# Altium PCB Carrierboard_PCB.PcbDoc
Units mm, origin at the board's own origin, x right, y up, seen from the top; angles counter-clockwise.
Board outline 50 x 50 mm, 2 copper layers (Top Layer, Bottom Layer); 29 components, 26 nets, 162 pads, 46 vias.
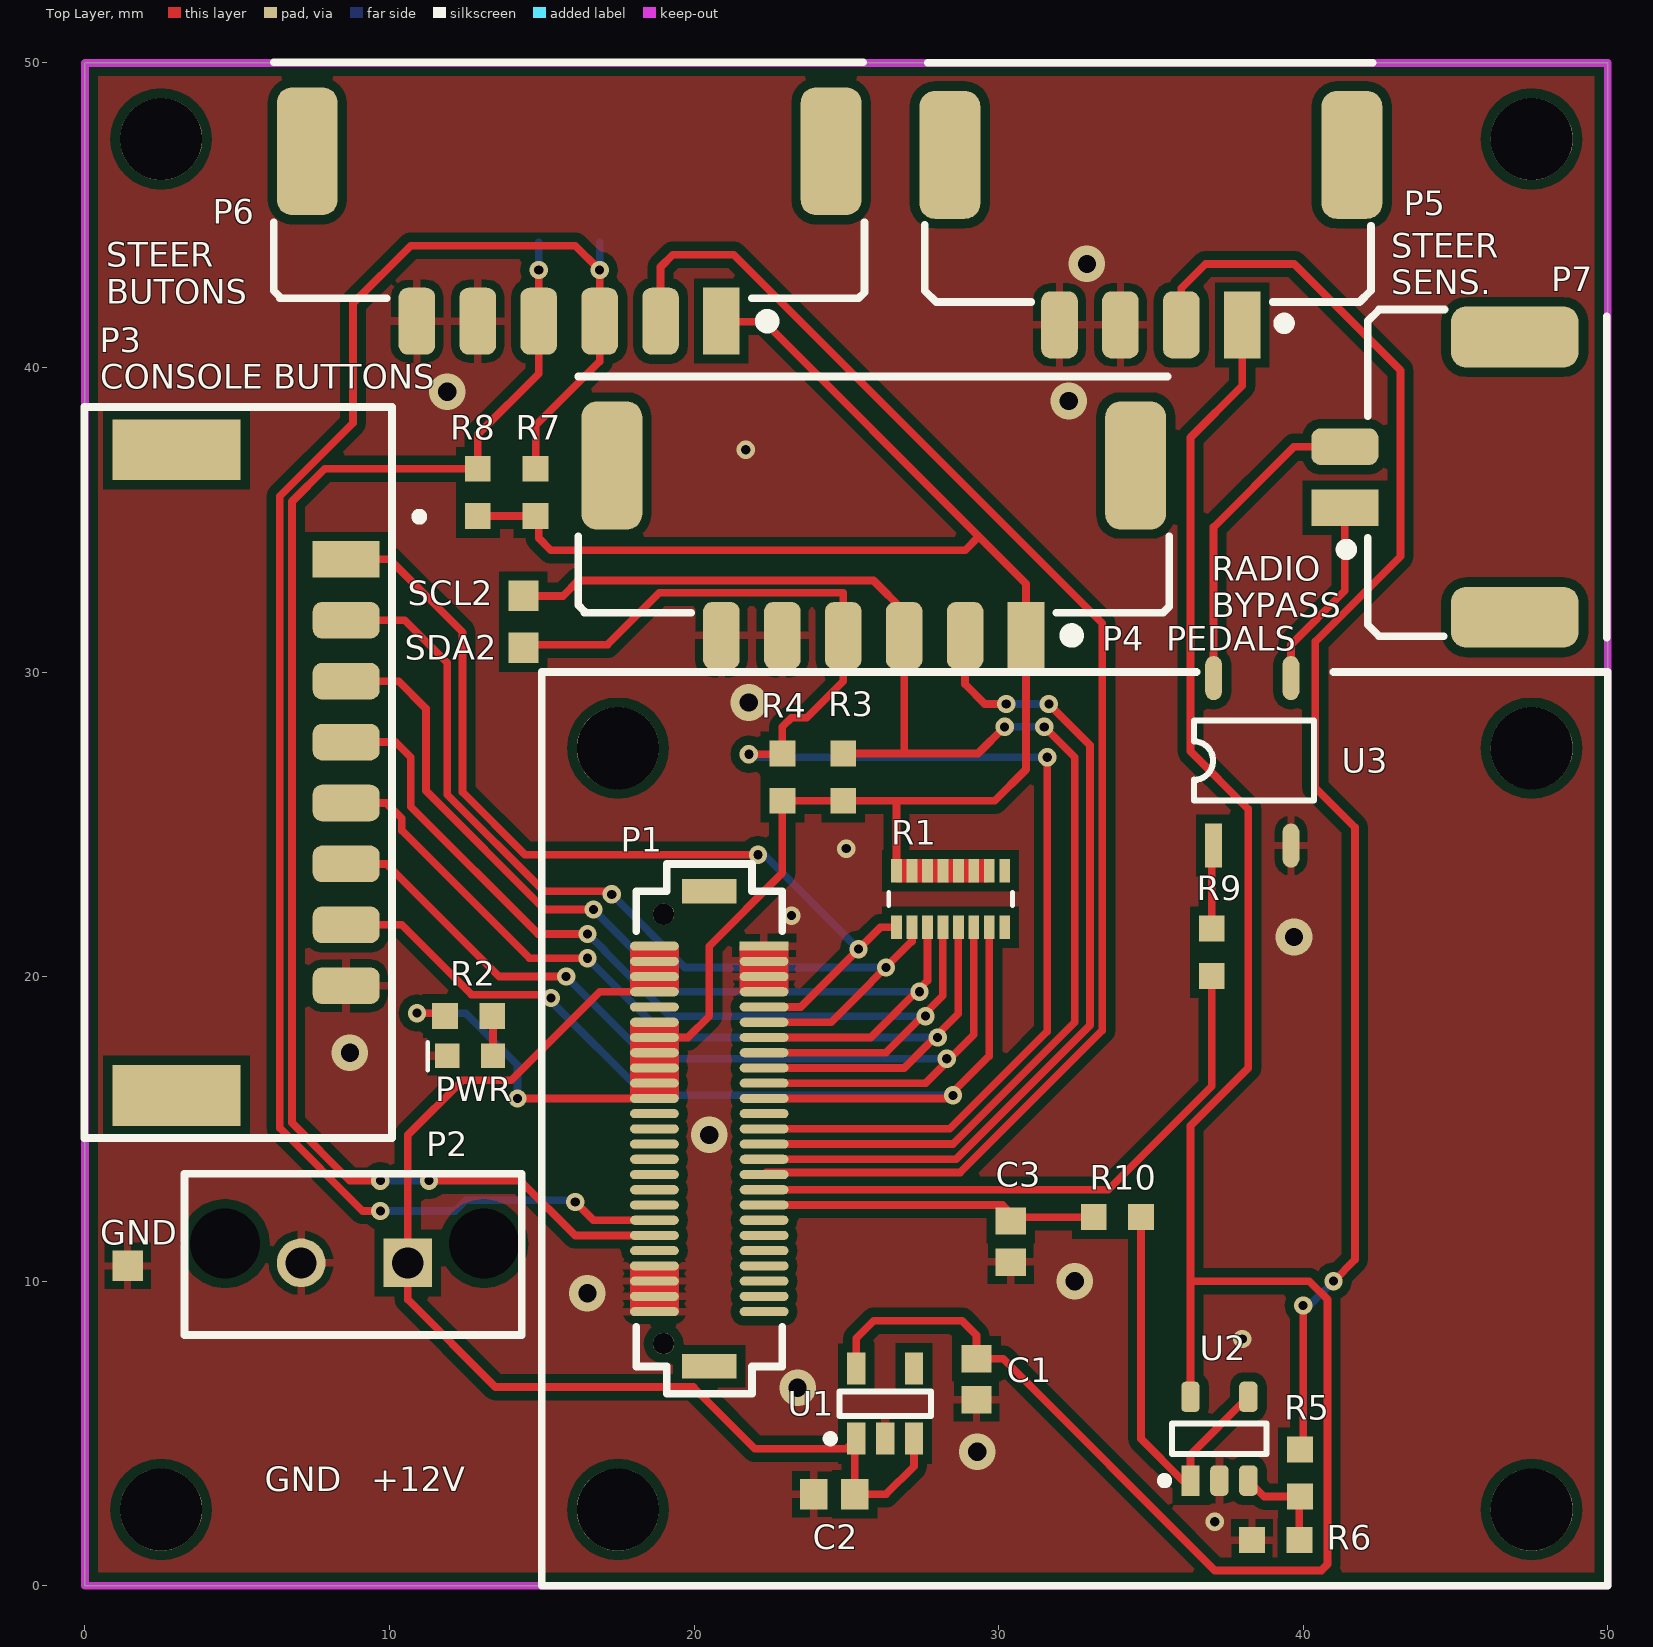
[diagram p0: Top Layer view]
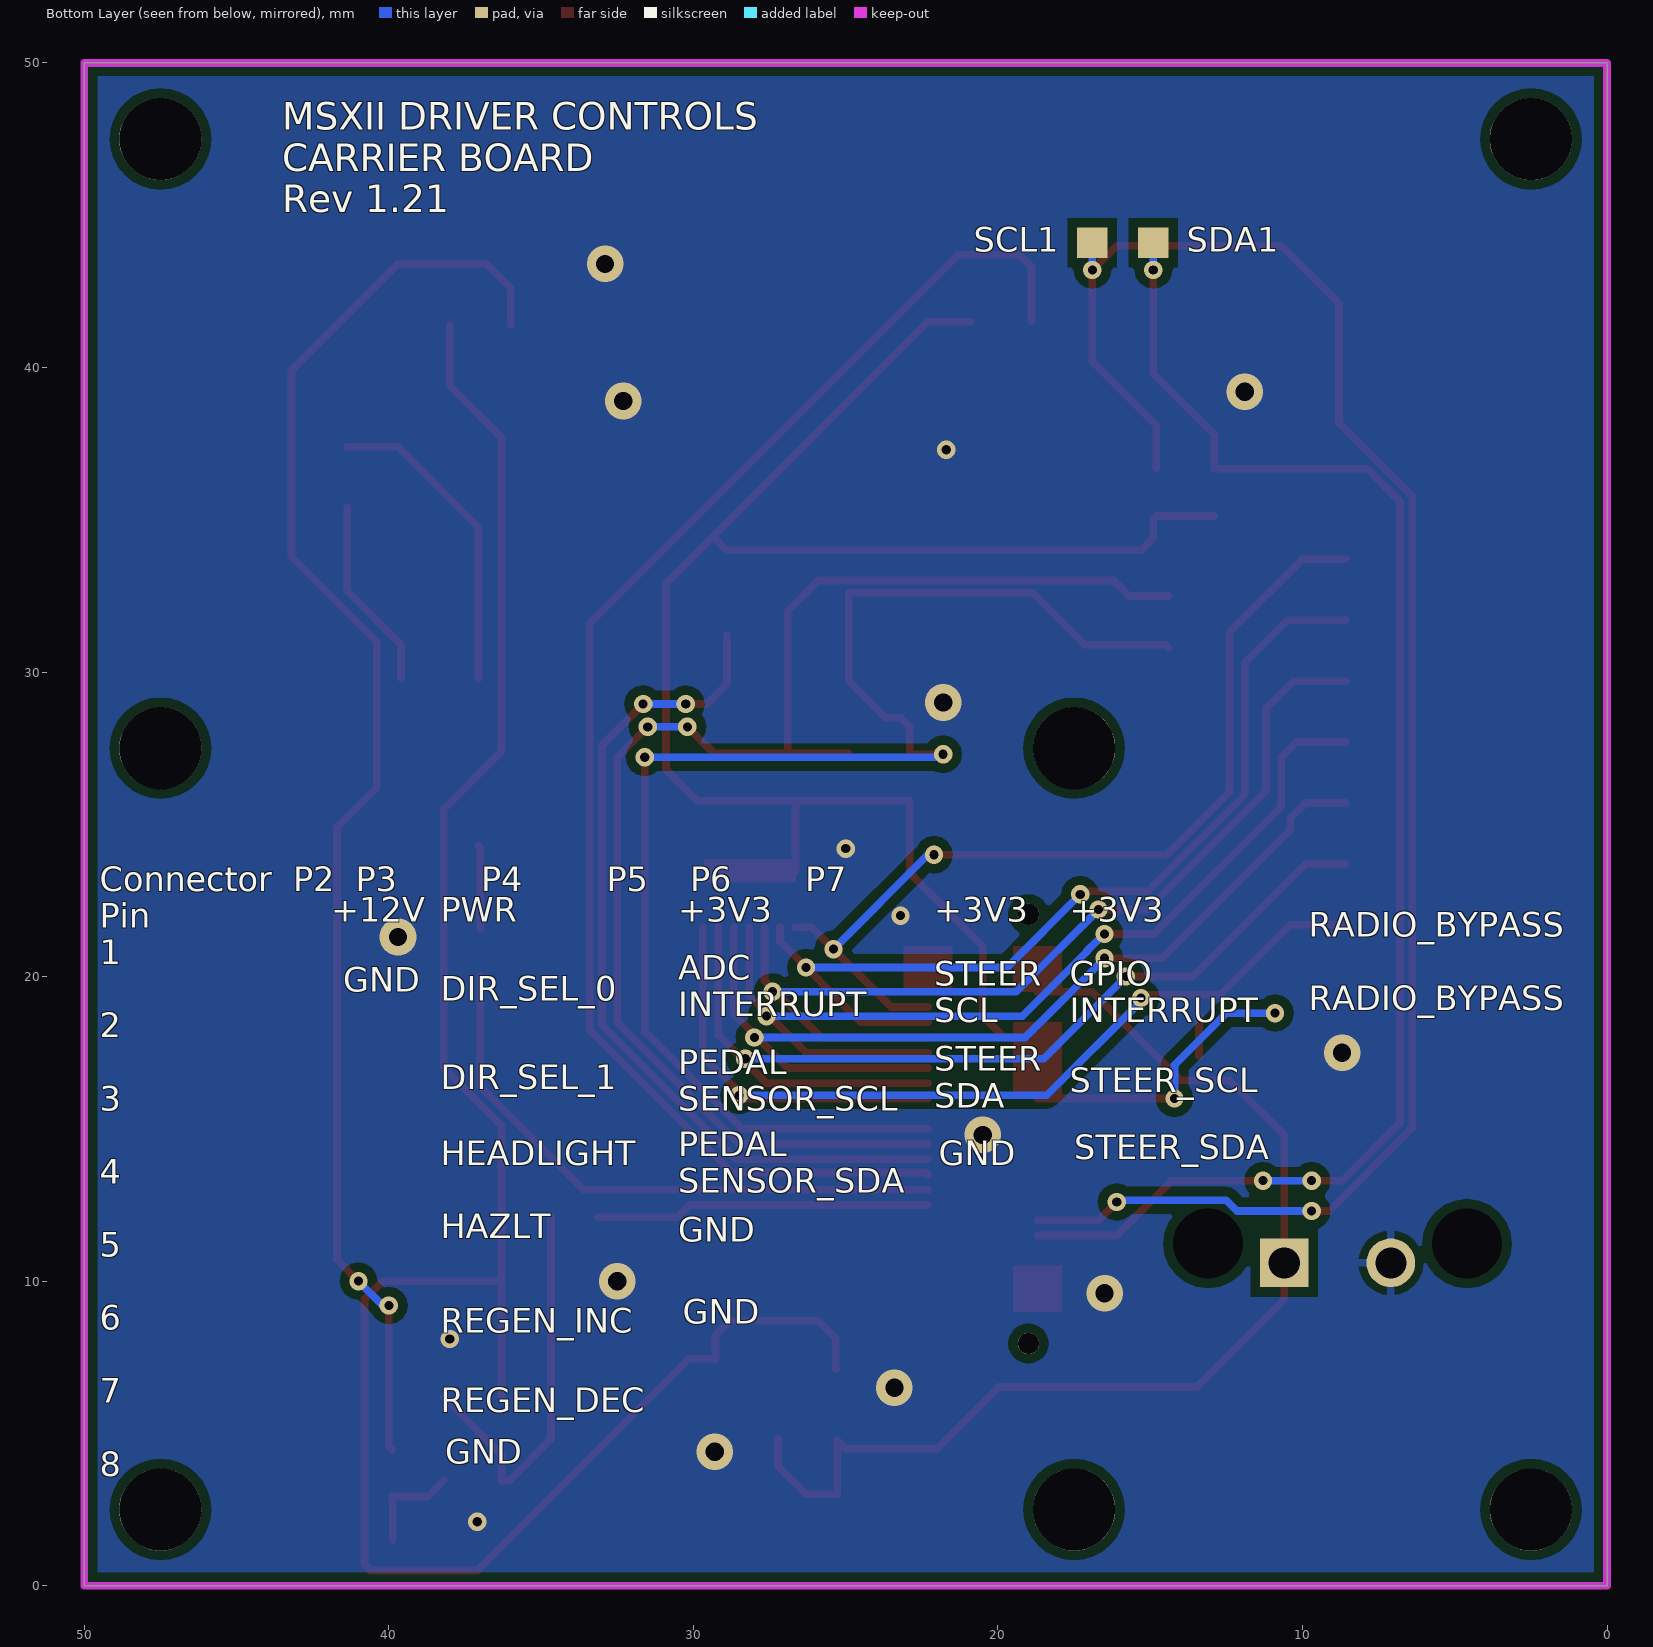
[diagram p1: Bottom Layer view, seen from below]
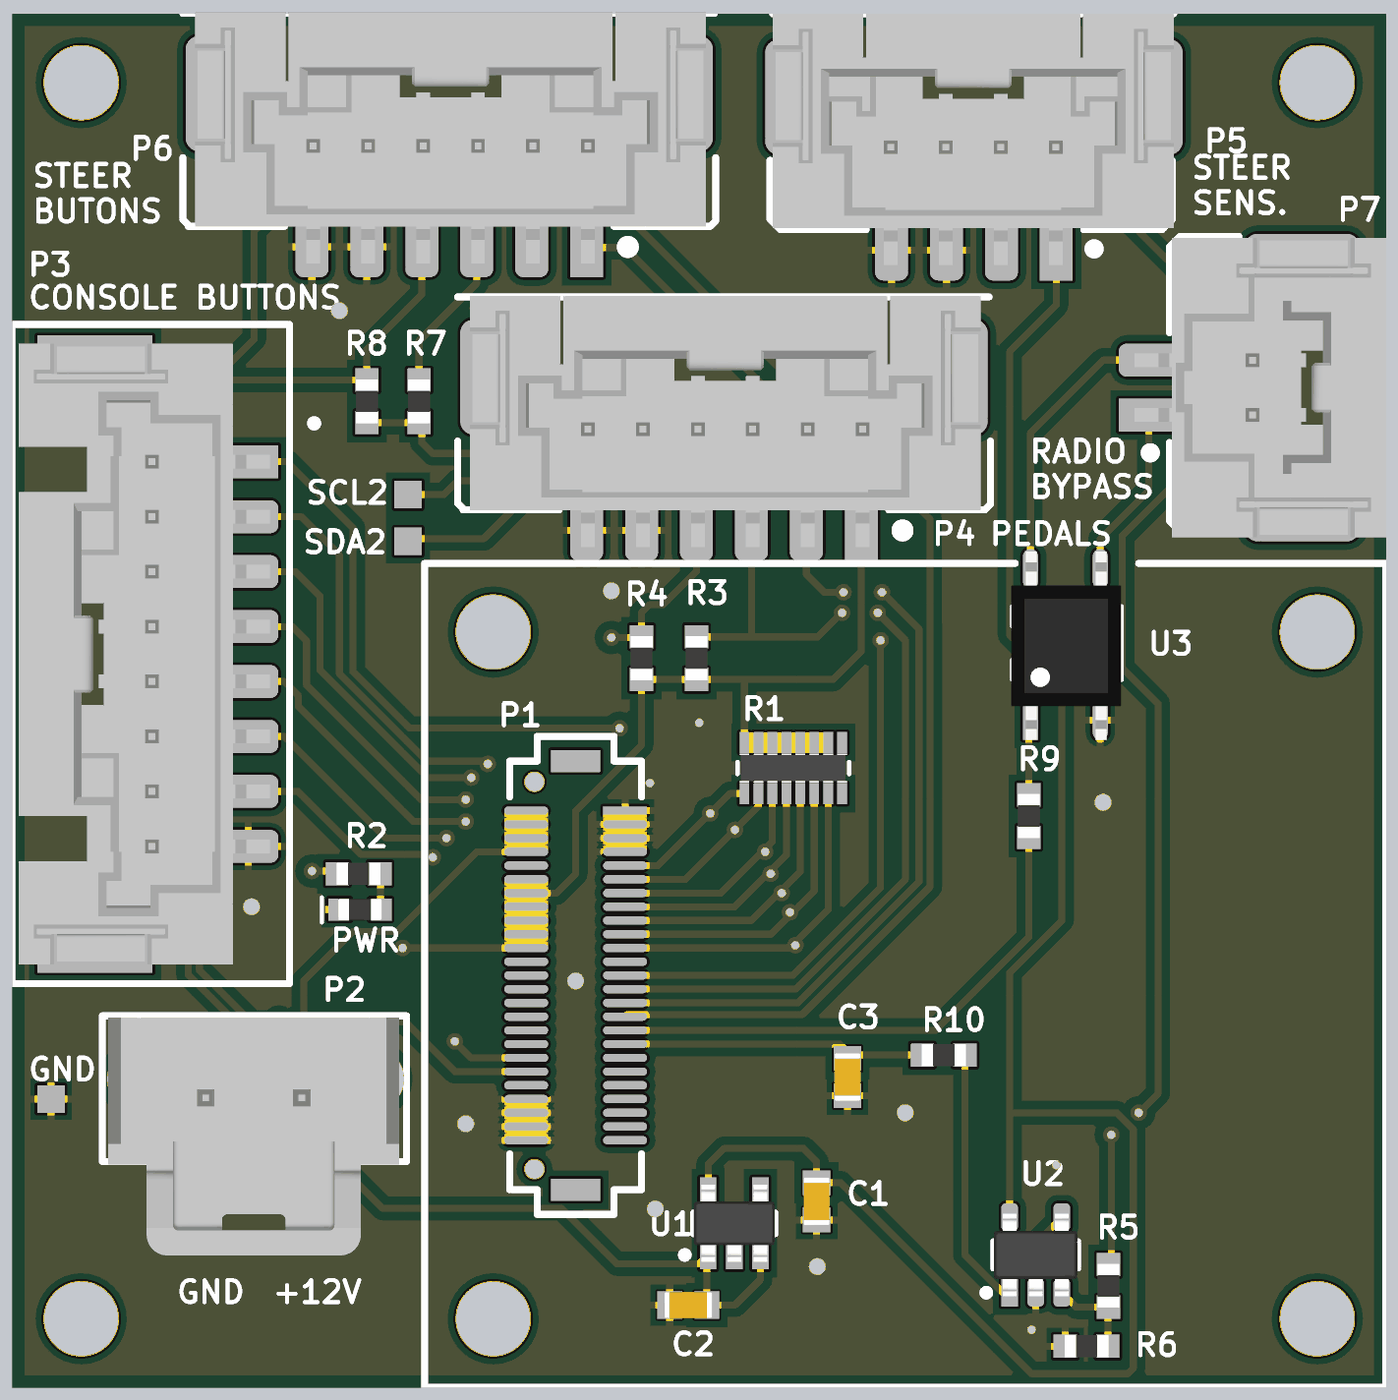
[diagram p2: 3D render of the assembled board from above, using the file's embedded part models]

## Layer stack, top to bottom
Top Solder: solder mask 0.0102, Solder Resist, Dk 3.5
Top Layer: signal copper 0.0356
Dielectric 1: dielectric 0.32, FR-4, Dk 4.8
Bottom Layer: signal copper 0.0356
Bottom Solder: solder mask 0.0102, Solder Resist, Dk 3.5

## Board outline
0,50 0,0 50,0 50,50

## Design rules (kind name [scope] priority, off if disabled: settings)
Clearance "Stitching GND" [IsStitchingVia and InNet('GND') vs (IsVia and (Not IsStitchingVia)) Or IsPad] p1: gap=0.127 ignorepadtopadclearanceinfootprint=FALSE
Clearance [All] p2: gap=0.152 ignorepadtopadclearanceinfootprint=FALSE except(0.305: Arc-Fill Arc-Poly Arc-Region Track-Fill Track-Poly Track-Region SMDPad-Fill SMDPad-Poly SMDPad-Region THPad-Fill THPad-Poly THPad-Region Via-Fill Via-Poly Via-Region)
PolygonConnect [All] p1: thpad.connectstyle=Relief thpad.reliefconductorwidth=0.254 thpad.reliefentries=4 thpad.polygonreliefangle="90 Angle" thpad.airgapwidth=0.254 smdpad.connectstyle=Relief smdpad.reliefconductorwidth=0.254 smdpad.reliefentries=4 smdpad.polygonreliefangle="90 Angle" smdpad.airgapwidth=0.254 via.connectstyle=Direct via.reliefconductorwidth=0.254 via.reliefentries=4 via.polygonreliefangle="90 Angle" via.airgapwidth=0.254
RoutingVias [All] p1: holewidth=0.711 width=1.27 viastyle="Through Hole" minholewidth=0.711 minwidth=1.27 maxholewidth=0.711 maxwidth=1.27
SolderMaskExpansion [All] p1: expansion=0.102
Width [All] p1: maxlimit=0.635 minlimit=0.254 preferedwidth=0.254
30 further rules are at their usual default settings.

## Classes and differential pairs
component class driverControlsMezzanine: P1

## Components (designator, comment, footprint, x,y, rotation, side; value= is the part's Value field where it differs from the comment)
C1 "CAP CER 2.2UF 25V 10% X5R 0603" "CAP, 0603" 29.275,6.775 r270 top
C2 "CAP CER 1UF 50V 10% X7R 0603" "CAP, 0603" 24.6,3 r180 top
C3 "CAP CER 10nF 50V 5% X7R 0603" "CAP, 0603" 30.4,11.3 r270 top
GND "Test Point" "Test Point"#1 1.4,10.5 r90 top (schematic designator TP5)
P1 "CONN 50POS Bergstak Plug 0.02\"" "CONN, Bergstak 50 Pos Plug" 20.5,15 r0 top
P2 "CONN 2POS ULTRA-FIT 0.138\"" "CONN, 2POS ULTRA-FIT" 10.6,10.6 r180 top
P3 "CONN 8POS DURA-CLIK 0.079\"" "CONN, 8POS Dura-Clik" 8.58,33.7 r270 top
P4 "DURA-CLIK" "CONN, 6POS DURA-CLIK VERT" 30.9,31.2 r180 top
P5 "DURA-CLIK" "CONN, 4POS DURA-CLIK VERT" 38,41.4 r180 top
P6 "DURA-CLIK" "CONN, 6POS DURA-CLIK VERT" 20.9,41.52 r180 top
P7 "Dura-Clik" "CONN, 2POS Dura-Click Vertical" 41.37,35.4 r90 top
PWR "LED GREEN CLEAR 2V 0603" LED_0603 13.35,17.41 r180 top (schematic designator LED1)
R1 "RES ARRAY 10K OHM 5% 8RES" "RES ARRAY, 8 POS 1506" 28.425,22.55 r90 top value=Value
R2 "RES 510 OHM 5% 1/10W 0603" "RES, 0603" 12.6,18.7 r0 top
R3 "1K" "RES, 0603" 24.9,26.55 r90 top
R4 "1K" "RES, 0603" 22.9,26.55 r90 top
R5 "RES 4.7K OHM 1% 1/10W 0603" "RES, 0603" 39.9,3.7 r270 top
R6 "RES 6.8k OHM 1% 1/10W 0603" "RES, 0603" 39.1,1.5 r180 top
R7 "1K" "RES, 0603" 14.8,35.9 r90 top
R8 "1K" "RES, 0603" 12.9,35.9 r90 top
R9 "2K" "RES, 0603" 37,20.8 r270 top
R10 "RES 0.0 OHM 1/4W 0603" "RES, 0603" 33.9,12.1 r180 top
SCL1 "Test Point" "Test Point"#2 16.9,44.1 r90 top (schematic designator TP3)
SCL2 "Test Point" "Test Point"#1 14.4,32.5 r90 top (schematic designator TP1)
SDA1 "Test Point" "Test Point"#2 14.9,44.1 r90 top (schematic designator TP4)
SDA2 "Test Point" "Test Point"#1 14.4,30.8 r90 top (schematic designator TP2)
U1 "IC REG LDO 5V 0.1A SOT23-5" SOT95P280X145-5N 26.275,5.975 r90 top
U2 "IC OP AMP GEN PURPOSE RR 10MHZ SOT-23-5" "IC OP AMP GP RR 10MHZ SOT-23-5" 37.25,4.825 r90 top
U3 "CPC1017N" "RELAY SOP4" 37.06,24.3 r90 top

## Footprints (in the part's own frame and the unit in brackets; to place one, negate y for a bottom-side part, rotate by r counter-clockwise, add the part's x,y. Pads: shape width x height; smd on the part's side, far side on the other; paste and mask are expansions set on the pad)
"CAP, 0603" [mm] "Chip Capacitor, 2-Leads, Body 1.60x0.81mm, IPC Medium Density"
  rect 0.9x1 smd mask+0.076: 1(-0.675,0) 2(0.675,0)
  body extent -0.87,-0.48 0.87,0.48, height 0.9
"CONN, 2POS Dura-Click Vertical" [mm] "WM7169CT-ND"
  rect 1.2x2.2 smd: 1(0,0)
  rrect50% 1.2x2.2 smd: 2(2,0)
  rrect50% 2x4.2 smd: 3(-3.6,-5.58) 3(5.6,-5.58)
  silkscreen extent -4.28,-8.6 6.5,0.05, body extent -4.45,-8.63 6.45,0.52, height 8
"CONN, 2POS ULTRA-FIT" [mm] "2 Positions Header, Shrouded Connector 0.138\" (3.50mm) Through Hole Gold"
  rect 1.6x1.6 hole 1.02: 1(0,0)
  round 1.6 hole 1.02: 2(3.5,0)
  round 1.6 hole 2.3: ""(-2.5,-0.63) ""(6,-0.63)
  silkscreen extent -3.74,-2.93 7.33,2.37, body extent -3.48,-2.87 7.12,5.79, height 13.85
"CONN, 4POS DURA-CLIK VERT" [mm]
  rect 1.2x2.2 smd: 1(0,0)
  rrect50% 1.2x2.2 smd: 2(2,0) 3(4,0) 4(6,0)
  rrect50% 2x4.2 smd: 7(-3.6,-5.58) 7(9.6,-5.58)
  silkscreen extent -4.28,-8.61 10.42,0.05, body extent -4.28,-8.61 10.32,0.54, height 8
"CONN, 6POS DURA-CLIK VERT" [mm]
  rect 1.2x2.2 smd: 1(0,0)
  rrect50% 1.2x2.2 smd: 2(2,0) 3(4,0) 4(6,0) 5(8,0) 6(10,0)
  rrect50% 2x4.2 smd: 7(-3.6,-5.58) 7(13.6,-5.58)
  silkscreen extent -4.7,-8.5 14.7,0.15, body extent -4.35,-8.54 14.25,0.61, height 7.97
"CONN, 8POS Dura-Clik" [mm] "WM10868CT-ND"
  rect 1.2x2.2 smd: 1(0,0)
  rrect50% 1.2x2.2 smd: 2(2,0) 3(4,0) 4(6,0) 5(8,0) 6(10,0) 7(12,0) 8(14,0)
  rect 2x4.2 smd: ""(-3.6,-5.58) ""(17.6,-5.58)
  silkscreen extent -5,-8.6 19,2.53, body extent -4.3,-8.36 18.3,0.79, height 8.02
"CONN, Bergstak 50 Pos Plug" [mm] "Bergstak 50 Position Plug"
  rect 1.6x0.3 smd: 1(1.8,6)
  oval 1.6x0.3 smd: 2(1.8,5.5) 3(1.8,5) 4(1.8,4.5) 5(1.8,4) 6(1.8,3.5) 7(1.8,3) 8(1.8,2.5) 9(1.8,2) 10(1.8,1.5) 11(1.8,1) 12(1.8,0.5) 13(1.8,0) 14(1.8,-0.5) 15(1.8,-1) 16(1.8,-1.5) 17(1.8,-2) 18(1.8,-2.5) 19(1.8,-3) 20(1.8,-3.5) 21(1.8,-4) 22(1.8,-4.5) 23(1.8,-5) 24(1.8,-5.5) 25(1.8,-6) 26(-1.8,-6) 27(-1.8,-5.5) 28(-1.8,-5) 29(-1.8,-4.5) 30(-1.8,-4) 31(-1.8,-3.5) 32(-1.8,-3) 33(-1.8,-2.5) 34(-1.8,-2) 35(-1.8,-1.5) 36(-1.8,-1) 37(-1.8,-0.5) 38(-1.8,0) 39(-1.8,0.5) 40(-1.8,1) 41(-1.8,1.5) 42(-1.8,2) 43(-1.8,2.5) 44(-1.8,3) 45(-1.8,3.5) 46(-1.8,4) 47(-1.8,4.5) 48(-1.8,5) 49(-1.8,5.5) 50(-1.8,6)
  round 0.7 hole 0.7: ""(-1.5,-7.05) ""(-1.5,7.05)
  rect 1.8x0.8 smd: ""(0,-7.8) ""(0,7.8)
  silkscreen extent -2.4,-8.7 2.4,8.7
"IC OP AMP GP RR 10MHZ SOT-23-5" [mm] "SOT23, 5-Leads, Body 2.90x2.80mm, Pitch 0.95mm, IPC Medium Density"
  rect 1x0.6 smd: 1(-1.375,0.95)
  rrect50% 1x0.6 smd: 2(-1.375,0) 3(-1.375,-0.95) 4(1.375,-0.95) 5(1.375,0.95)
  silkscreen extent -1.5,-1.55 0.5,1.92, body extent -1.5,-1.53 1.5,1.53, height 1.45
LED_0603 [mm]
  rect 0.8x0.8 smd: 1(-0.05,0.01) 2(1.45,0.01)
  silkscreen extent 2.09,-0.43 2.09,0.48, body extent -0.1,-0.39 1.5,0.41, height 0.55
"RELAY SOP4" [mm]
  rect 1.45x0.55 smd: 1(0,0)
  oval 1.45x0.55 smd: 2(0,-2.54) 3(5.5,-2.54) 4(5.5,0)
  silkscreen extent 1.48,-3.3 4.12,0.65, body extent -0.73,-3.3 6.13,0.7, height 2.02
"RES ARRAY, 8 POS 1506" [mil]
  rect 30x14 smd: 1(-36.5,70) 2(-36.5,50) 3(-36.5,30) 4(-36.5,10) 5(-36.5,-10) 6(-36.5,-30) 7(-36.5,-50) 8(-36.5,-70) 9(36.5,-70) 10(36.5,-50) 11(36.5,-30) 12(36.5,-10) 13(36.5,10) 14(36.5,30) 15(36.5,50) 16(36.5,70)
  silkscreen extent -9,-80 9,80, body extent -21,-77 21,77, height 18
"RES, 0603" [mm] "Chip Resistor, 2-Leads, Body 1.60x0.80mm, IPC Medium Density"
  rect 0.85x0.85 smd: 1(-0.775,0) 2(0.775,0)
  body extent -0.8,-0.4 0.8,0.4, height 0.55
SOT95P280X145-5N [mm] "SOT23, 5-Leads, Body 2.95x2.80mm, Pitch 0.95mm, IPC Medium Density"
  rect 1.05x0.6 smd: 1(-1.15,0.95) 2(-1.15,0) 3(-1.15,-0.95) 4(1.15,-0.95) 5(1.15,0.95)
  silkscreen extent -1.27,-1.5 0.4,1.92, body extent -1.4,-1.48 1.4,1.48, height 1.45
"Test Point"#1 [mm]
  rect 1x1 smd: TP(0,0)
"Test Point"#2 [mm]
  rect 1x1 smd far side: TP(0,0)

## Part data
C1: "2.2µF ±10% 25V Ceramic Capacitor X5R 0603 (1608 Metric)", Capacitance=2.2µF, Manufacturer 1="Murata Electronics North America", Manufacturer Part Number 1=GRM188R61E225KA12D, Operating Temperature="-55°C ~ 85°C", Package / Case="0603 (1608 Metric)", Ratings=-, Supplier Part Number 1=490-10731-1-ND, Temperature Coefficient=X5R, Tolerance=±10%, Voltage=25V, ComponentLink1Description=http://www.murata.com/~/media/webrenewal/support/library/catalog/products/capacitor/mlcc/c02e.ashx, ComponentLink1URL=http://www.murata.com/~/media/webrenewal/support/library/catalog/products/capacitor/mlcc/c02e.ashx, Height - Seated (Max)=-, Lead Spacing=-, Lead Style=-, Mounting Type="Surface Mount, MLCC", Packaging="Cut Tape (CT)", Part Status=Active, Size / Dimension="0.063\" L x 0.031\" W (1.60mm x 0.80mm)", Supplier 1=Digi-Key, Thickness (Max)="0.035\" (0.90mm)"
C2: "1µF ±10% 50V Ceramic Capacitor X7R 0603 (1608 Metric)", Capacitance=1µF, Manufacturer 1="Taiyo Yuden", Manufacturer Part Number 1=UMK107AB7105KA-T, Operating Temperature="-55°C ~ 125°C", Package / Case="0603 (1608 Metric)", Ratings=-, Supplier Part Number 1=587-3247-1-ND, Temperature Coefficient=X7R, Tolerance=±10%, Voltage=50V, ComponentLink1Description=http://www.yuden.co.jp/productdata/catalog/en/mlcc_all_e.pdf, ComponentLink1URL=http://www.yuden.co.jp/productdata/catalog/en/mlcc_all_e.pdf, Height - Seated (Max)=-, Lead Spacing=-, Lead Style=-, Mounting Type="Surface Mount, MLCC", Packaging="Cut Tape (CT)", Part Status=Active, Size / Dimension="0.063\" L x 0.031\" W (1.60mm x 0.80mm)", Supplier 1=Digi-Key, Thickness (Max)="0.037\" (0.95mm)"
C3: "10000pF ±5% 50V Ceramic Capacitor U2J 0603 (1608 Metric)", Capacitance=10000pF, Manufacturer 1=KEMET, Manufacturer Part Number 1=C0603C103J5JAC7867, Operating Temperature="-55°C ~ 125°C", Package / Case="0603 (1608 Metric)", Ratings=-, Supplier Part Number 1=399-13384-1-ND, Temperature Coefficient=U2J, Tolerance=±5%, Voltage=50V, ComponentLink1Description=http://www.kemet.com/docfinder?Partnumber=C0603C103J5JAC7867, ComponentLink1URL=http://www.kemet.com/docfinder?Partnumber=C0603C103J5JAC7867, Failure Rate=-, Height - Seated (Max)=-, Lead Spacing=-, Lead Style=-, Mounting Type="Surface Mount, MLCC", Packaging="Cut Tape (CT)", Part Status=Active, Size / Dimension="0.063\" L x 0.032\" W (1.60mm x 0.80mm)", Supplier 1=Digi-Key, Thickness (Max)="0.034\" (0.87mm)"
P1: "50 Position Connector Plug, Outer Shroud Contacts Surface Mount Gold", Manufacturer 1="Amphenol FCI", Manufacturer Part Number 1=10132797-055100LF, Supplier Part Number 1=609-5226-1-ND, ComponentLink1Description=http://portal.fciconnect.com/Comergent//fci/drawing/10132797.pdf, ComponentLink1URL=http://portal.fciconnect.com/Comergent//fci/drawing/10132797.pdf, Connector Type="Plug, Outer Shroud Contacts", Contact Finish=Gold, Contact Finish Thickness="1µin (0.025µm)", Height Above Board="0.169\" (4.30mm)", Mated Stacking Heights=5mm, Mounting Type="Surface Mount", Number of Positions=50, Number of Rows=2, Packaging="Cut Tape (CT)", Part Status=Active, Pitch="0.020\" (0.50mm)", Series="BergStak Plug", Supplier 1=Digi-Key
P2: "2 Positions Header, Shrouded Connector 0.138\" (3.50mm) Through Hole Gold", Current Rating=-, Insulation Color=Black, Manufacturer 1="Molex, LLC", Manufacturer Part Number 1=1722861302, Material Flammability Rating="UL94 V-0", Operating Temperature="-40°C ~ 120°C", Supplier Part Number 1=WM11673-ND, Voltage=400V, ComponentLink1Description=http://www.molex.com/pdm_docs/sd/1722861302_sd.pdf, ComponentLink1URL=http://www.molex.com/pdm_docs/sd/1722861302_sd.pdf, Connector Type=Header, Contact Finish - Mating=Gold, Contact Finish - Post=Tin, Contact Finish Thickness - Mating="30µin (0.76µm)", Contact Finish Thickness - Post="60µin (1.52µm)", Contact Length - Mating=-, Contact Length - Post="0.126\" (3.20mm)", Contact Material="Copper Alloy", Contact Shape=Square, Contact Type="Male Pin", Fastening Type="Latch Holder", Ingress Protection=-, Insulation Height="0.465\" (11.80mm)", Insulation Material="Liquid Crystal Polymer (LCP)", Mated Stacking Heights=26.99mm, Mounting Type="Through Hole", Number of Positions=2, Number of Positions Loaded=All, Number of Rows=1, Overall Contact Length=-, Packaging=Tray, Part Status=Active, Pitch - Mating="0.138\" (3.50mm)", Row Spacing - Mating=-, Series=UltraFit, Shrouding="Shrouded - 4 Wall", Style="Board to Board or Cable", Supplier 1=Digi-Key, Termination="Kinked Pin, Solder"
P3: "8 Positions Header Connector 0.079\" (2.00mm) Surface Mount Tin", Current Rating=-, Insulation Color=Natural, Manufacturer 1="Molex, LLC", Manufacturer Part Number 1=5600200820, Supplier Part Number 1=WM10868CT-ND, ComponentLink1Description=http://www.molex.com/pdm_docs/sd/5600200820_sd.pdf, ComponentLink1URL=http://www.molex.com/pdm_docs/sd/5600200820_sd.pdf, Connector Type=Header, Contact Finish - Mating=Tin, Contact Finish - Post=Tin, Contact Finish Thickness - Mating=-, Contact Finish Thickness - Post=-, Contact Length - Mating=-, Contact Length - Post=-, Contact Material="Copper Alloy", Contact Shape=Square, Contact Type="Male Pin", Fastening Type="Latch Lock", Ingress Protection=-, Insulation Height="0.315\" (8.00mm)", Insulation Material="Polyamide (PA), Nylon", Mated Stacking Heights=9.3mm, Material Flammability Rating=-, Mounting Type="Surface Mount", Number of Positions=8, Number of Positions Loaded=All, Number of Rows=1, Operating Temperature=-, Overall Contact Length=-, Packaging="Cut Tape (CT)", Part Status=Active, Pitch - Mating="0.079\" (2.00mm)", Row Spacing - Mating=-, Series=DuraClik, Shrouding="Shrouded - 4 Wall", Style="Board to Cable/Wire", Supplier 1=Digi-Key, Termination=Solder, Voltage=-
P4 P6: library part "CONN 6POS DURA-CLIK 0.079\"", "6 Positions Header, Shrouded Connector 0.079\" (2.00mm) Surface Mount, Vertical Tin", Current Rating=-, Insulation Color=Natural, Manufacturer=Molex, Manufacturer Part Number=5600200820, Supplier Part Number 1=WM10866CT-ND, Applications="Automotive, Industrial", Category="Connectors, Interconnects", ComponentLink1Description=http://www.molex.com/pdm_docs/sd/5600200220_sd.pdf, ComponentLink1URL=http://www.molex.com/pdm_docs/sd/5600200220_sd.pdf, Connector Type=Header, Contact Finish - Mating=Tin, Contact Finish - Post=Tin, Contact Finish Thickness - Mating=-, Contact Finish Thickness - Post=-, Contact Length - Mating=-, Contact Length - Post=-, Contact Material="Copper Alloy", Contact Shape=Square, Contact Type="Male Pin", Fastening Type="Latch Lock", Features="Solder Retention", Ingress Protection=-, Insulation Height="0.315\" (8.00mm)", Insulation Material="Polyamide (PA), Nylon", Mated Stacking Heights=9.3mm, Material Flammability Rating=-, Mounting Type="Surface Mount", Number of Positions=6, Number of Positions Loaded=All, Number of Rows=1, Operating Temperature=-, Overall Contact Length=-, Packaging="Cut Tape (CT)", Part Status=Active, Pitch - Mating="0.079\" (2.00mm)", Pricing 1="1=1.76, 10=1.542, 25=1.4512, 50=1.391, 100=1.3305, 250=1.20956 (CAD)", RoHS="RoHS Compliant", Row Spacing - Mating=-, Shrouding="Shrouded - 4 Wall", Stock 1=3826, Style="Board to Cable/Wire", Supplier 1=Digi-Key, Termination=Solder, Voltage Rating=-
P5: library part "CONN 4POS DURA-CLIK 0.079\"", "4 Positions Header Connector 0.079\" (2.00mm) Surface Mount Tin", Current Rating=-, Insulation Color=Natural, Manufacturer="Molex, LLC", Manufacturer Part Number=5600200420, Supplier Part Number 1=WM10864CT-ND, Applications="Automotive, Industrial", Category="Connectors, Interconnects", ComponentLink1Description=http://www.molex.com/pdm_docs/sd/5600200420_sd.pdf, ComponentLink1URL=http://www.molex.com/pdm_docs/sd/5600200420_sd.pdf, Connector Type=Header, Contact Finish - Mating=Tin, Contact Finish - Post=Tin, Contact Finish Thickness - Mating=-, Contact Finish Thickness - Post=-, Contact Length - Mating=-, Contact Length - Post=-, Contact Material="Copper Alloy", Contact Shape=Square, Contact Type="Male Pin", Fastening Type="Latch Lock", Features="Solder Retention", Ingress Protection=-, Insulation Height="0.315\" (8.00mm)", Insulation Material="Polyamide (PA), Nylon", Mated Stacking Heights=9.3mm, Material Flammability Rating=-, Mounting Type="Surface Mount", Number of Positions=4, Number of Positions Loaded=All, Number of Rows=1, Operating Temperature=-, Overall Contact Length=-, Packaging="Cut Tape (CT)", Part Status=Active, Pitch - Mating="0.079\" (2.00mm)", Pricing 1="1=2.23, 10=2.022, 25=1.898, 50=1.8156, 100=1.733 (CAD)", RoHS="RoHS Compliant", Row Spacing - Mating=-, Shrouding="Shrouded - 4 Wall", Stock 1=9367, Style="Board to Cable/Wire", Supplier 1=Digi-Key, Termination=Solder, Voltage Rating=-
P7: library part "CONN 2POS DURA-CLIK 0.079\" VERT", "2 Positions Header, Shrouded Connector 0.079\" (2.00mm) Surface Mount, Vertical Tin", Current Rating=-, Insulation Color=Natural, Manufacturer="Molex, LLC", Manufacturer Part Number=5600200220, Supplier Part Number 1=WM10862CT-ND, Applications="Automotive, Industrial", Category="Connectors, Interconnects", ComponentLink1Description=http://www.molex.com/pdm_docs/sd/5600200220_sd.pdf, ComponentLink1URL=http://www.molex.com/pdm_docs/sd/5600200220_sd.pdf, Connector Type=Header, Contact Finish - Mating=Tin, Contact Finish - Post=Tin, Contact Finish Thickness - Mating=-, Contact Finish Thickness - Post=-, Contact Length - Mating=-, Contact Length - Post=-, Contact Material="Copper Alloy", Contact Shape=Square, Contact Type="Male Pin", Fastening Type="Latch Lock", Features="Solder Retention", Ingress Protection=-, Insulation Height="0.315\" (8.00mm)", Insulation Material="Polyamide (PA), Nylon", Mated Stacking Heights=9.3mm, Material Flammability Rating=-, Mounting Type="Surface Mount", Number of Positions=2, Number of Positions Loaded=All, Number of Rows=1, Operating Temperature=-, Overall Contact Length=-, Packaging="Cut Tape (CT)", Part Status=Active, Pitch - Mating="0.079\" (2.00mm)", Pricing 1="1=1.16, 10=1.012, 25=0.952, 50=0.9122, 100=0.8727, 250=0.79336 (CAD)", RoHS="RoHS Compliant", Row Spacing - Mating=-, Shrouding="Shrouded - 4 Wall", Stock 1=11912, Style="Board to Cable/Wire", Supplier 1=Digi-Key, Termination=Solder, Voltage Rating=-
PWR: "Green 572nm LED Indication - Discrete 2V 0603 (1608 Metric)", Color=Green, Current - Test=20mA, Lens Color=Colorless, Manufacturer="Wurth Electronics Inc.", Manufacturer Part Number=150060VS75000, Millicandela Rating=40mcd, Package / Case="0603 (1608 Metric)", Supplier Device Package=0603, Supplier Part Number 1=732-4980-1-ND, Voltage - Forward (Vf) (Typ)=2V, Category=Optoelectronics, ComponentLink1Description=http://katalog.we-online.de/led/datasheet/150060VS75000.pdf, ComponentLink1URL=http://katalog.we-online.de/led/datasheet/150060VS75000.pdf, Features=-, Height (Max)=0.80mm, Lens Style/Size="Rectangle with Flat Top, 1.10mm x 0.70mm", Lens Transparency=Clear, Mounting Type="Surface Mount", Packaging="Cut Tape (CT)", Part Status=Active, Pricing 1="1=0.21, 100=0.1617, 500=0.13964 (CAD)", RoHS="RoHS Compliant", Size / Dimension="1.60mm L x 0.80mm W", Stock 1=9408, Supplier 1=Digi-Key, Viewing Angle=140°, Wavelength - Dominant=570nm, Wavelength - Peak=572nm
R1: library part "RES ARRAY 10K OHM 5% 8RES EXB-2HV103JV", "RES ARRAY SMD 10K 5% 62.5mW 1506", Manufacturer="Panasonic Electronic Components", Manufacturer_Part_Number=EXB-2HV103JV, Operating Temperature="-55°C ~ 125°C", Package / Case="1506, Convex, Long Side Terminals", Power Per Element=62.5mW, Resistance (Ohms)=10k, Supplier Device Package=1506, Supplier Part Number 1=Y1103CT-ND, Temperature Coefficient=±200ppm/°C, Tolerance=±5%, Applications="Automotive AEC-Q200", C="Copyright (C) 2015 Accelerated Designs. All rights reserved", Category=Resistors, Circuit Type=Isolated, ComponentLink1Description=https://industrial.panasonic.com/cdbs/www-data/pdf/AOC0000/AOC0000C14.pdf, ComponentLink1URL=https://industrial.panasonic.com/cdbs/www-data/pdf/AOC0000/AOC0000C14.pdf, Copyright="Copyright (C) 2015 Accelerated Designs. All rights reserved", Height - Seated (Max)="0.022\" (0.55mm)", Manufacturer Part Number=EXB-2HV103JV, Mounting Type="Surface Mount", Packaging="Cut Tape (CT)", Part Status=Active, Pricing 1="1=0.43, 10=0.373, 25=0.2712, 50=0.1964, 100=0.1456, 250=0.11176, 500=0.08806, 1000=0.06096 (CAD)", RoHS="RoHS Compliant", Size / Dimension="0.150\" L x 0.063\" W (3.80mm x 1.60mm)", Stock 1=152779, Supplier 1=Digi-Key, Vendor=Panasonic
R2: "RES SMD 510 OHM 5% 1/10W 0603", Manufacturer 1=Yageo, Manufacturer Part Number 1=RC0603JR-07510RL, Operating Temperature="-55°C ~ 155°C", Package / Case="0603 (1608 Metric)", Power=1/10W, Resistance=510, Supplier Device Package=0603, Supplier Part Number 1=311-510GRCT-ND, Temperature Coefficient=±100ppm/°C, Tolerance=±5%, ComponentLink1Description=http://www.yageo.com/documents/recent/PYu-RC_Group_51_RoHS_L_7.pdf, ComponentLink1URL=http://www.yageo.com/documents/recent/PYu-RC_Group_51_RoHS_L_7.pdf, Composition="Thick Film", Failure Rate=-, Height - Seated (Max)="0.022\" (0.55mm)", Packaging="Cut Tape (CT)", Part Status=Active, Size / Dimension="0.063\" L x 0.031\" W (1.60mm x 0.80mm)", Supplier 1=Digi-Key
R3 R4 R7 R8: library part "RES 1K OHM 5% 1/10W 0603", "1k Ohm ±5% 0.1W, 1/10W Chip Resistor 0603 (1608 Metric)", Manufacturer=Yageo, Manufacturer Part Number=RC0603JR-071KL, Operating Temperature="-55°C ~ 155°C", Package / Case="0603 (1608 Metric)", Power (Watts)="0.1W, 1/10W", Resistance (Ohms)=1k, Supplier Device Package=0603, Supplier Part Number 1=311-1.0KGRCT-ND, Temperature Coefficient=±100ppm/°C, Tolerance=±5%, Category=Resistors, ComponentLink1Description=http://www.yageo.com/documents/recent/PYu-RC_Group_51_RoHS_L_7.pdf, ComponentLink1URL=http://www.yageo.com/documents/recent/PYu-RC_Group_51_RoHS_L_7.pdf, Composition="Thick Film", Failure Rate=-, Features="Moisture Resistant", Height - Seated (Max)="0.022\" (0.55mm)", Packaging="Cut Tape (CT)", Part Status=Active, Pricing 1="1=0.15, 10=0.017, 100=0.0071, 1000=0.0032, 2500=0.00278 (CAD)", RoHS="RoHS Compliant", Size / Dimension="0.063\" L x 0.031\" W (1.60mm x 0.80mm)", Stock 1=4415240, Supplier 1=Digi-Key
R5: "4.7k Ohm ±1% 0.1W, 1/10W Chip Resistor 0603 (1608 Metric) Moisture Resistant Thick Film", Manufacturer 1=Yageo, Manufacturer Part Number 1=RC0603FR-074K7L, Operating Temperature="-55°C ~ 155°C", Package / Case="0603 (1608 Metric)", Power (Watts)=1/10W, Resistance (Ohms)=4.7k, Supplier Device Package=0603, Supplier Part Number 1=311-4.70KHRCT-ND, Temperature Coefficient=±100ppm/°C, Tolerance=±1%, Category=Resistors, ComponentLink1Description=http://www.yageo.com/documents/recent/PYu-RC_Group_51_RoHS_L_7.pdf, ComponentLink1URL=http://www.yageo.com/documents/recent/PYu-RC_Group_51_RoHS_L_7.pdf, Composition="Thick Film", Description 1="RES SMD 4.7K OHM 1% 1/10W 0603", Failure Rate=-, Features="Moisture Resistant", Height - Seated (Max)="0.022\" (0.55mm)", Packaging="Cut Tape (CT)", Part Status=Active, Pricing 1="1=0.16, 10=0.022, 100=0.0089, 1000=0.00402, 2500=0.00349 (CAD)", RoHS="RoHS Compliant", Size / Dimension="0.063\" L x 0.031\" W (1.60mm x 0.80mm)", Stock 1=3487566, Supplier 1=Digi-Key
R6: "RES SMD 6.8K OHM 1% 1/10W 0603", Manufacturer 1="Stackpole Electronics Inc.", Manufacturer Part Number 1=RMCF0603FT6K80, Operating Temperature="-55°C ~ 155°C", Package / Case="0603 (1608 Metric)", Power=1/10W, Resistance=6.8k, Supplier Device Package=0603, Supplier Part Number 1=RMCF0603FT6K80CT-ND, Temperature Coefficient=±100ppm/°C, Tolerance=±1%, ComponentLink1Description=https://www.seielect.com/Catalog/SEI-RMCF_RMCP.pdf, ComponentLink1URL=https://www.seielect.com/Catalog/SEI-RMCF_RMCP.pdf, Composition="Thick Film", Failure Rate=-, Height - Seated (Max)="0.022\" (0.55mm)", Packaging="Cut Tape (CT)", Part Status=Active, Size / Dimension="0.061\" L x 0.031\" W (1.55mm x 0.80mm)", Supplier 1=Digi-Key
R9: library part "RES 2K OHM 1% 1/10W 0603", "2k Ohm ±1% 0.1W, 1/10W Chip Resistor 0603 (1608 Metric) Moisture Resistant Thick Film", Manufacturer=Yageo, Manufacturer Part Number=RC0603FR-072KL, Operating Temperature="-55°C ~ 155°C", Package / Case="0603 (1608 Metric)", Power (Watts)="0.1W, 1/10W", Resistance (Ohms)=2k, Supplier Device Package=0603, Supplier Part Number 1=311-2.00KHRCT-ND, Temperature Coefficient=±100ppm/°C, Tolerance=±1%, Category=Resistors, ComponentLink1Description=http://www.yageo.com/documents/recent/PYu-RC_Group_51_RoHS_L_7.pdf, ComponentLink1URL=http://www.yageo.com/documents/recent/PYu-RC_Group_51_RoHS_L_7.pdf, Composition="Thick Film", Failure Rate=-, Features="Moisture Resistant", Height - Seated (Max)="0.022\" (0.55mm)", Packaging="Cut Tape (CT)", Part Status=Active, Pricing 1="1=0.15, 10=0.023, 100=0.0093, 1000=0.00415, 2500=0.0036 (CAD)", RoHS="RoHS Compliant", Size / Dimension="0.063\" L x 0.031\" W (1.60mm x 0.80mm)", Stock 1=1750701, Supplier 1=Digi-Key
R10: "RES SMD 0.0 OHM JUMPER 1/4W 0603", Manufacturer 1="Vishay Dale", Manufacturer Part Number 1=CRCW06030000Z0EAHP, Operating Temperature="-55°C ~ 155°C", Package / Case="0603 (1608 Metric)", Power (Watts)=1/4W, Resistance=0.0, Supplier Device Package=0603, Supplier Part Number 1=541-0.0SBCT-ND, ComponentLink1Description=http://www.vishay.com/docs/20043/crcwhpe3.pdf, ComponentLink1URL=http://www.vishay.com/docs/20043/crcwhpe3.pdf, Composition="Thick Film", Failure Rate=-, Height - Seated (Max)="0.022\" (0.55mm)", Packaging="Cut Tape (CT)", Part Status=Active, Size / Dimension="0.063\" L x 0.033\" W (1.60mm x 0.85mm)", Supplier 1=Digi-Key
U1: "Linear Voltage Regulator IC Positive Fixed Output 5V 100mA SOT-23-5", Current - Limit (Min)=-, Current - Output=100mA, Manufacturer 1=STMicroelectronics, Manufacturer Part Number 1=LD2981CM50TR, Operating Temperature="-40°C ~ 125°C", Package / Case="SC-74A, SOT-753", Supplier Device Package=SOT-23-5, Supplier Part Number 1=497-7787-1-ND, Voltage - Dropout (Typical)="0.18V @ 100mA", Voltage - Input="Up to 16V", Voltage - Output=5V, ComponentLink1Description=http://www.st.com/content/ccc/resource/technical/document/datasheet/group1/b7/b5/a1/83/9c/bd/4a/90/CD00001635/files/CD00001635.pdf/jcr:content/translations/en.CD00001635.pdf, ComponentLink1URL=http://www.st.com/content/ccc/resource/technical/document/datasheet/group1/b7/b5/a1/83/9c/bd/4a/90/CD00001635/files/CD00001635.pdf/jcr:content/translations/en.CD00001635.pdf, Mounting Type="Surface Mount", Packaging="Cut Tape (CT)", Part Status=Active, Regulator Topology="Positive Fixed", Supplier 1=Digi-Key
U2: "General Purpose Amplifier 1 Circuit Rail-to-Rail SOT-23-5", Current - Output / Channel=50mA, Current - Supply=400µA, Manufacturer 1="Texas Instruments", Manufacturer Part Number 1=TLV316QDBVRQ1, Operating Temperature="-40°C ~ 125°C", Package / Case="SC-74A, SOT-753", Supplier Device Package=SOT-23-5, Supplier Part Number 1=296-45323-1-ND, Voltage - Supply, Single/Dual (±)="1.8 V ~ 5.5 V, ±0.9 V ~ 2.75 V", -3db Bandwidth=-, Amplifier Type="General Purpose", Category="Integrated Circuits (ICs)", ComponentLink1Description=http://www.ti.com/lit/ds/symlink/tlv316-q1.pdf, ComponentLink1URL=http://www.ti.com/lit/ds/symlink/tlv316-q1.pdf, Description 1="IC OP AMP GP RR 10MHZ 5-SOT-23", Mounting Type="Surface Mount", Number of Circuits=1, Output Type=Rail-to-Rail, Packaging="Cut Tape (CT)", Part Status=Active, Pricing 1="1=1.33, 10=1.185, 100=0.9234, 500=0.76276, 1000=0.60218 (CAD)", RoHS="RoHS Compliant", Slew Rate="6 V/µs", Stock 1=1747, Supplier 1=Digi-Key
U3: library part "RELAY CPC1017N SPST 100mA", "Relay Solid-State SPST-NO 4-SOP", Manufacturer="IXYS Integrated Circuits Division", Manufacturer Part Number=CPC1017NTR, On-State Resistance (Max)="16 Ohm", Package / Case="4-SOP (0.150\", 3.81mm)", Supplier Device Package="4-SOP (2.54mm)", Supplier Part Number 1=CLA233CT-ND, Voltage - Input=1.2VDC, Voltage - Load="0 ~ 60 V", Category=Relays, Circuit="SPST-NO (1 Form A)", ComponentLink1Description=http://www.ixysic.com/home/pdfs.nsf/www/CPC1017N.pdf/$file/CPC1017N.pdf, ComponentLink1URL=http://www.ixysic.com/home/pdfs.nsf/www/CPC1017N.pdf/$file/CPC1017N.pdf, Mounting Type="Surface Mount", Output Type="AC, DC", Packaging="Cut Tape (CT)", Part Status=Active, Pricing 1="1=1.76, 10=1.561, 25=1.41, 100=1.2334, 250=1.0824, 500=0.95658, 1000=0.75519 (CAD)", Relay Type=Relay, RoHS="RoHS Compliant", Stock 1=86929, Supplier 1=Digi-Key, Termination Style="Gull Wing"

## Free pads (board coordinates)
  round 2.7 hole 2.7: ""(2.5,2.5) ""(2.5,47.5) ""(17.5,2.5) ""(17.5,27.5) ""(47.5,47.5) ""(47.5,2.5) ""(47.5,27.5)

## Via types
v1: diameter 0.6, hole 0.3, Top Layer to Bottom Layer, tented both sides, 35 vias
v2: diameter 1.2, hole 0.6, Top Layer to Bottom Layer, tented both sides, 11 vias

## Nets (pads, with @x,y where several pads share a name; then routed paths per layer and width w, separated by ;. In a path a pad name is that pad's centre, name@x,y a point inside that pad or via, vN(x,y) a via of type N, cw(c..) or ccw(c..) an arc to the next point about the centre after c; other vN are vias at no path point)
+3V3: P1.40 P1.41 P1.42 P1.43 P1.44 P1.45 P4.1 P6.1 R1.10 R1.11 R1.12 R1.13 R1.14 R1.15 R1.16 R2.1 R3.1 R4.1 R7.1 R8.1 | length 68.6
  Top Layer w0.254: v1(10.9,18.8) 11.725,18.8 R2.1 ; R8.1 R7.1 14.9,35.025 14.9,34.4 15.3,34 28.9,34 29.35,34.45 ; v1(14.2,16) P1.40 ; P1.44 19.8,18 20.5,18.7 20.5,21 22.9,23.4 R4.1 R3.1 29.875,25.775 30.9,26.8 P4.1 30.9,32.9 29.35,34.45 ; P6.1@20.9,41.5 22.3,41.5 29.35,34.45 ; R1.16 26.647,25.775
  Bottom Layer w0.254: v1(10.9,18.8) 12.5,18.8 14.2,17.1 v1(14.2,16)
+5V: C1.1 P5.1 U1.5 U2.5 | length 71.6
  Top Layer w0.254: U1.5 25.325,8.125 25.9,8.7 28.8,8.7 29.275,8.225 C1.1 30.15,7.45 37.1,0.5 40.6,0.5 40.8,0.7 40.8,9.4 40.2,10 36.3,10 ; U2.5 36.3,8.525 36.3,10 ; P5.1 38,39.4 36.3,37.7 36.3,27.4 38.2,25.5 38.2,17 36.3,15.1 36.3,10
+12V: C2.1 P1.47 P1.48 P1.49 P1.50 P2.1 U1.1 U1.3 | length 37.3
  Top Layer w0.254: P1.47 16.9,19.5 14,16.6 12.4,16.6 10.6,14.8 P2.1 10.6,9.4 13.479,6.521 19.979,6.521 22,4.5 25,4.5 25.275,4.775 C2.1 26.3,3 27.225,3.925 U1.3
BYPASS_IN: P7.1 U3.3 | length 6.3
  Top Layer w0.254: U3.3 39.6,30.9 41.37,32.67 P7.1
BYPASS_OUT: P7.2 U3.4 | length 10.4
  Top Layer w0.254: U3.4 37.06,34.76 39.7,37.4 P7.2
GND: C1.2 C2.2 C3.2 GND.TP P1.1 P1.2 P1.3 P1.4 P1.26 P1.27 P1.28 P1.29 P2.2 P3.8 P4.5 P4.6 P5.3 P5.4 P6.5 P6.6 PWR.2 R6.2 U1.2 U2.2 U3.2
  other v1: 37.1,2.1 38,8.1 23.2,22 25,24.2 21.7,37.3
  other v2: 29.3,4.4 23.4,6.5 16.5,9.6 32.5,10 20.5,14.8 8.7,17.5 39.7,21.3 21.8,29 32.3,38.9 11.9,39.2 32.9,43.4
NetLED1_1: PWR.1 R2.2 | length 1.3
  Top Layer w0.254: R2.2 13.4,18.675 PWR.1
NetR5_2: R5.2 R6.1 U2.3 | length 3.4
  Top Layer w0.254: U2.3 38.725,2.925 R5.2 39.875,2.9 R6.1
NetR9_1: R9.1 U3.1 | length 2.7
  Top Layer w0.254: R9.1 37,24.24 U3.1
NetR10_1: R10.1 U2.1 U2.4 | length 13
  Top Layer w0.254: R10.1 34.675,4.825 36.05,3.45 U2.1 36.3,4.3 U2.4
PA7/ANALOG_READ: C3.1 P1.18 R10.2 | length 11
  Top Layer w0.254: P1.18 30.125,12.5 30.525,12.1 R10.2
PA8/DIRECTION_SELECT_1: P1.7 P3.3 R1.3 | length 32.5
  Top Layer w0.254: P3.3 10.3,29.7 11.2,28.8 11.2,26.1 15.1,22.2 v1(16.7,22.2) ; P1.7 25.8,18 27.663,19.863 R1.3
  Bottom Layer w0.254: v1(16.7,22.2) 19.4,19.5 v1(27.4,19.5)
PA9/DIRECTION_SELECT_0: P1.6 P3.2 R1.2 | length 31.4
  Top Layer w0.254: P3.2 10.5,31.7 11.9,30.3 11.9,25.975 15.075,22.8 17.2,22.8 v1(17.3,22.7) ; P1.6 24.5,18.5 27.155,21.155 R1.2
  Bottom Layer w0.254: v1(17.3,22.7) 19.7,20.3 v1(26.3,20.3)
PA10/POWER: P1.5 P3.1 R1.1 | length 30.6
  Top Layer w0.254: P3.1 10,33.7 12.4,31.3 12.4,26.049 14.449,24 v1(22.1,24) ; P1.5 23.5,19 v1(25.4,20.9) 26.123,21.623 R1.1
  Bottom Layer w0.254: v1(22.1,24) 22.3,24 v1(25.4,20.9)
PB0/PUSH_TO_TALK: P1.17 R9.2 | length 19.7
  Top Layer w0.254: P1.17 33.6,13 37,16.4 R9.2
PB1/GPIO_EXPANDER_INTERRUPT: P1.16 P6.2 | length 47.9
  Top Layer w0.254: P6.2 18.9,43.3 19.3,43.7 21.3,43.7 33.4,31.6 33.4,27.775 33.406,27.768 33.406,18.232 28.745,13.571 22.371,13.571 P1.16
PB2/ADC_INTERRUPT: P1.15 P4.2 | length 28.3
  Top Layer w0.254: P1.15 28.6,14 33,18.4 33,27.6 v1(31.65,28.95) ; P4.2 28.9,29.6 29.55,28.95 v1(30.25,28.95)
  Bottom Layer w0.254: v1(30.25,28.95) v1(31.65,28.95)
PB8/I2C1_SCL: P1.32 P6.3 R7.2 SCL1.TP | length 59.4
  Top Layer w0.254: v1(9.7,12.3) 9.125,12.3 6.394,15.032 6.394,35.768 8.8,38.175 8.8,42.1 10.7,44 16.1,44 v1(16.9,43.2) P6.3 ; R7.2 14.8,38.1 16.9,40.2 P6.3@16.9,41.5 ; v1(16.1,12.6) 16.7,12 P1.32
  Bottom Layer w0.254: v1(9.7,12.3) 12.149,12.3 12.508,12.659 16.041,12.659 v1(16.1,12.6) ; v1(16.9,43.2) SCL1.TP
PB9/I2C1_SDA: P1.31 P6.4 R8.2 SDA1.TP | length 48.6
  Top Layer w0.254: v1(9.7,13.3) 8.7,13.3 6.8,15.2 6.8,35.6 7.875,36.675 R8.2 12.9,37.8 14.9,39.8 P6.4@14.9,41.5 ; v1(11.3,13.3) 14.3,13.3 16.1,11.5 P1.31 ; P6.4 v1(14.9,43.2)
  Bottom Layer w0.254: v1(9.7,13.3) v1(11.3,13.3) ; v1(14.9,43.2) SDA1.TP
PB10/I2C2_SCL: P1.14 P4.3 R3.2 SCL2.TP | length 46.7
  Top Layer w0.254: SCL2.TP 15.7,32.5 16.206,33.006 25.894,33.006 26.9,32 P4.3 26.9,27.325 ; P1.14 28.5,14.5 32.5,18.5 32.5,27.2 v1(31.5,28.2) ; R3.2 26.9,27.325 ; v1(30.2,28.2) 29.325,27.325 26.9,27.325
  Bottom Layer w0.254: v1(30.2,28.2) v1(31.5,28.2)
PB11/I2C2_SDA: P1.13 P4.4 R4.2 SDA2.TP | length 48.2
  Top Layer w0.254: SDA2.TP 14.5,30.9 17.156,30.9 18.856,32.6 24.9,32.6 P4.4 24.9,29.7 23.7,28.5 23.2,28.5 22.9,28.2 R4.2 22.875,27.3 v1(21.8,27.3) ; P1.13 28.4,15 31.6,18.2 v1(31.6,27.2)
  Bottom Layer w0.254: v1(21.8,27.3) 21.9,27.2 v1(31.6,27.2)
PB12/BRAKING_REGEN_DECREASE: P1.11 P3.7 R1.7 | length 34.5
  Top Layer w0.254: P3.7 10.4,21.7 12.696,19.404 15.196,19.404 v1(15.3,19.3) ; P1.11 28.3,16 29.695,17.395 R1.7
  Bottom Layer w0.254: v1(15.3,19.3) 15.3,19.2 18.4,16.1 v1(28.5,16.1)
PB13/BRAKING_REGEN_INCREASE: P1.10 P3.6 R1.6 | length 33.5
  Top Layer w0.254: P3.6 9.9,23.7 13.6,20 v1(15.8,20) ; P1.10 27.6,16.5 29.187,18.087 R1.6
  Bottom Layer w0.254: v1(15.8,20) 18.5,17.3 v1(28.3,17.3)
PB14/HAZARD_LIGHT: P1.9 P3.5 R1.5 | length 32.8
  Top Layer w0.254: P3.5 9.9,25.7 10.4,25.2 10.4,24.8 14.6,20.6 v1(16.5,20.6) ; P1.9 26.9,17 28.679,18.779 R1.5
  Bottom Layer w0.254: v1(16.5,20.6) 19.1,18 v1(28,18)
PB15/HEADLIGHT: P1.8 P3.4 R1.4 | length 32.6
  Top Layer w0.254: P3.4 10.2,27.7 10.7,27.2 10.7,25.58 14.88,21.4 v1(16.5,21.4) ; P1.8 26.3,17.5 28.171,19.371 R1.4
  Bottom Layer w0.254: v1(16.5,21.4) 16.721,21.179 16.74,21.179 17.079,20.84 17.079,20.821 19.2,18.7 v1(27.6,18.7)
STEER_ANALOG: P5.2 R5.1 | length 48.2
  Top Layer w0.254: P5.2 36,42.6 36.8,43.4 39.7,43.4 43.2,39.9 43.2,33.8 40.4,31 40.4,26.2 41.7,24.9 41.7,10.7 v1(41,10) ; R5.1 40,4.575 v1(40,9.2)
  Bottom Layer w0.254: v1(40,9.2) 40.2,9.2 v1(41,10)
pads on no net: P1. P1.12 P1.19 P1.20 P1.21 P1.22 P1.23 P1.24 P1.25 P1.30 P1.33 P1.34 P1.35 P1.36 P1.37 P1.38 P1.39 P1.46 P2. P3. P4.7 P5.7 P6.7 P7.3 R1.8 R1.9 U1.4

## Polygon pours and split planes (outlines as drawn)
GND on Bottom Layer "Bottom Layer-GND" (solid, remove dead copper, pour order 2): 0,0 0,50 50,50 50,0
GND on Top Layer "Top Layer-GND" (solid, remove dead copper, pour order 0): 0,0 0,50 50,50 50,0

## Keep-outs
Keep-Out Layer:
  the board outline again, w0.254

## Other copper
Top Layer:
  region net +3V3: 26.647,23.102 29.647,23.102 29.647,23.852 26.647,23.852
  region net +3V3: 17.9,18.5 17.9,16 19.5,16 19.5,18.5
  region net +12V: 17.9,19.5 19.5,19.5 19.5,21 17.9,21
  region net GND: 17.9,10.5 19.5,10.5 19.5,9 17.9,9
  region net GND: 21.5,19.5 23.1,19.5 23.1,21 21.5,21

## Silkscreen, mask and mechanical layers (free items; w line width, h text height)
Top Overlay:
  lines w0.254: 36.5,30 15,30 15,0 50,0 50,30 41,30
  text "STEER / SENS." at 42.9,42.4 h0.8
  text "STEER / BUTONS" at 0.7,42.1 h0.8
  text "CONSOLE BUTTONS" at 0.5,39.3 h0.8
  text "RADIO / BYPASS" at 37,31.8 h0.8
  text "PEDALS" at 35.5,30.7 h0.8
  text "GND" at 5.9,3.1 h0.8
  text "+12V" at 9.4,3.1 h0.8
Bottom Overlay:
  text "MSXII DRIVER CONTROLS / CARRIER BOARD / Rev 1.21" at 43.5,45.1 h0.9
  text "+3V3" at 17.65,21.8 h0.8
  text "+3V3" at 22.1,21.8 h0.8
  text "+3V3" at 30.5,21.8 h0.8
  text "PWR" at 38.3,21.8 h0.8
  text "+12V" at 41.9,21.8 h0.8
  text "GND" at 41.5,19.5 h0.8
  text "DIR_SEL_0" at 38.3,19.2 h0.8
  text "RADIO_BYPASS /  / RADIO_BYPASS" at 9.8,18.9 h0.8
  text "ADC / INTERRUPT" at 30.5,18.7 h0.8
  text "GPIO / INTERRUPT" at 17.65,18.5 h0.8
  text "STEER  / SCL" at 22.1,18.5 h0.8
  text "DIR_SEL_1" at 38.3,16.3 h0.8
  text "STEER_SCL" at 17.65,16.2 h0.8
  text "STEER / SDA" at 22.1,15.7 h0.8
  text "PEDAL / SENSOR_SCL" at 30.5,15.6 h0.8
  text "STEER_SDA" at 17.5,14 h0.8
  text "GND" at 21.95,13.8 h0.8
  text "HEADLIGHT" at 38.3,13.8 h0.8
  text "PEDAL / SENSOR_SDA" at 30.5,12.9 h0.8
  text "HAZLT" at 38.3,11.4 h0.8
  text "GND" at 30.5,11.3 h0.8
  text "GND" at 30.35,8.6 h0.8
  text "REGEN_INC" at 38.3,8.3 h0.8
  text "REGEN_DEC" at 38.3,5.7 h0.8
  text "GND" at 38.15,4 h0.8
  text "Connector  P2  P3        P4        P5    P6       P7 / Pin / 1                 /  / 2               /  / 3                            /  / 4 /  / 5 /  / 6 /  / 7 /  / 8" at 49.5,3.6 h0.8